# Altium PCB PCB1.PcbDoc
Units mil, origin at the board's own origin, x right, y up, seen from the top; angles counter-clockwise.
Board outline 4000 x 4000 mil, 4 copper layers (Top Layer, Internal Plane 1, Internal Plane 2, Bottom Layer), stack 18.2 mil thick; 19 components, 14 nets, 55 pads, 17 vias.
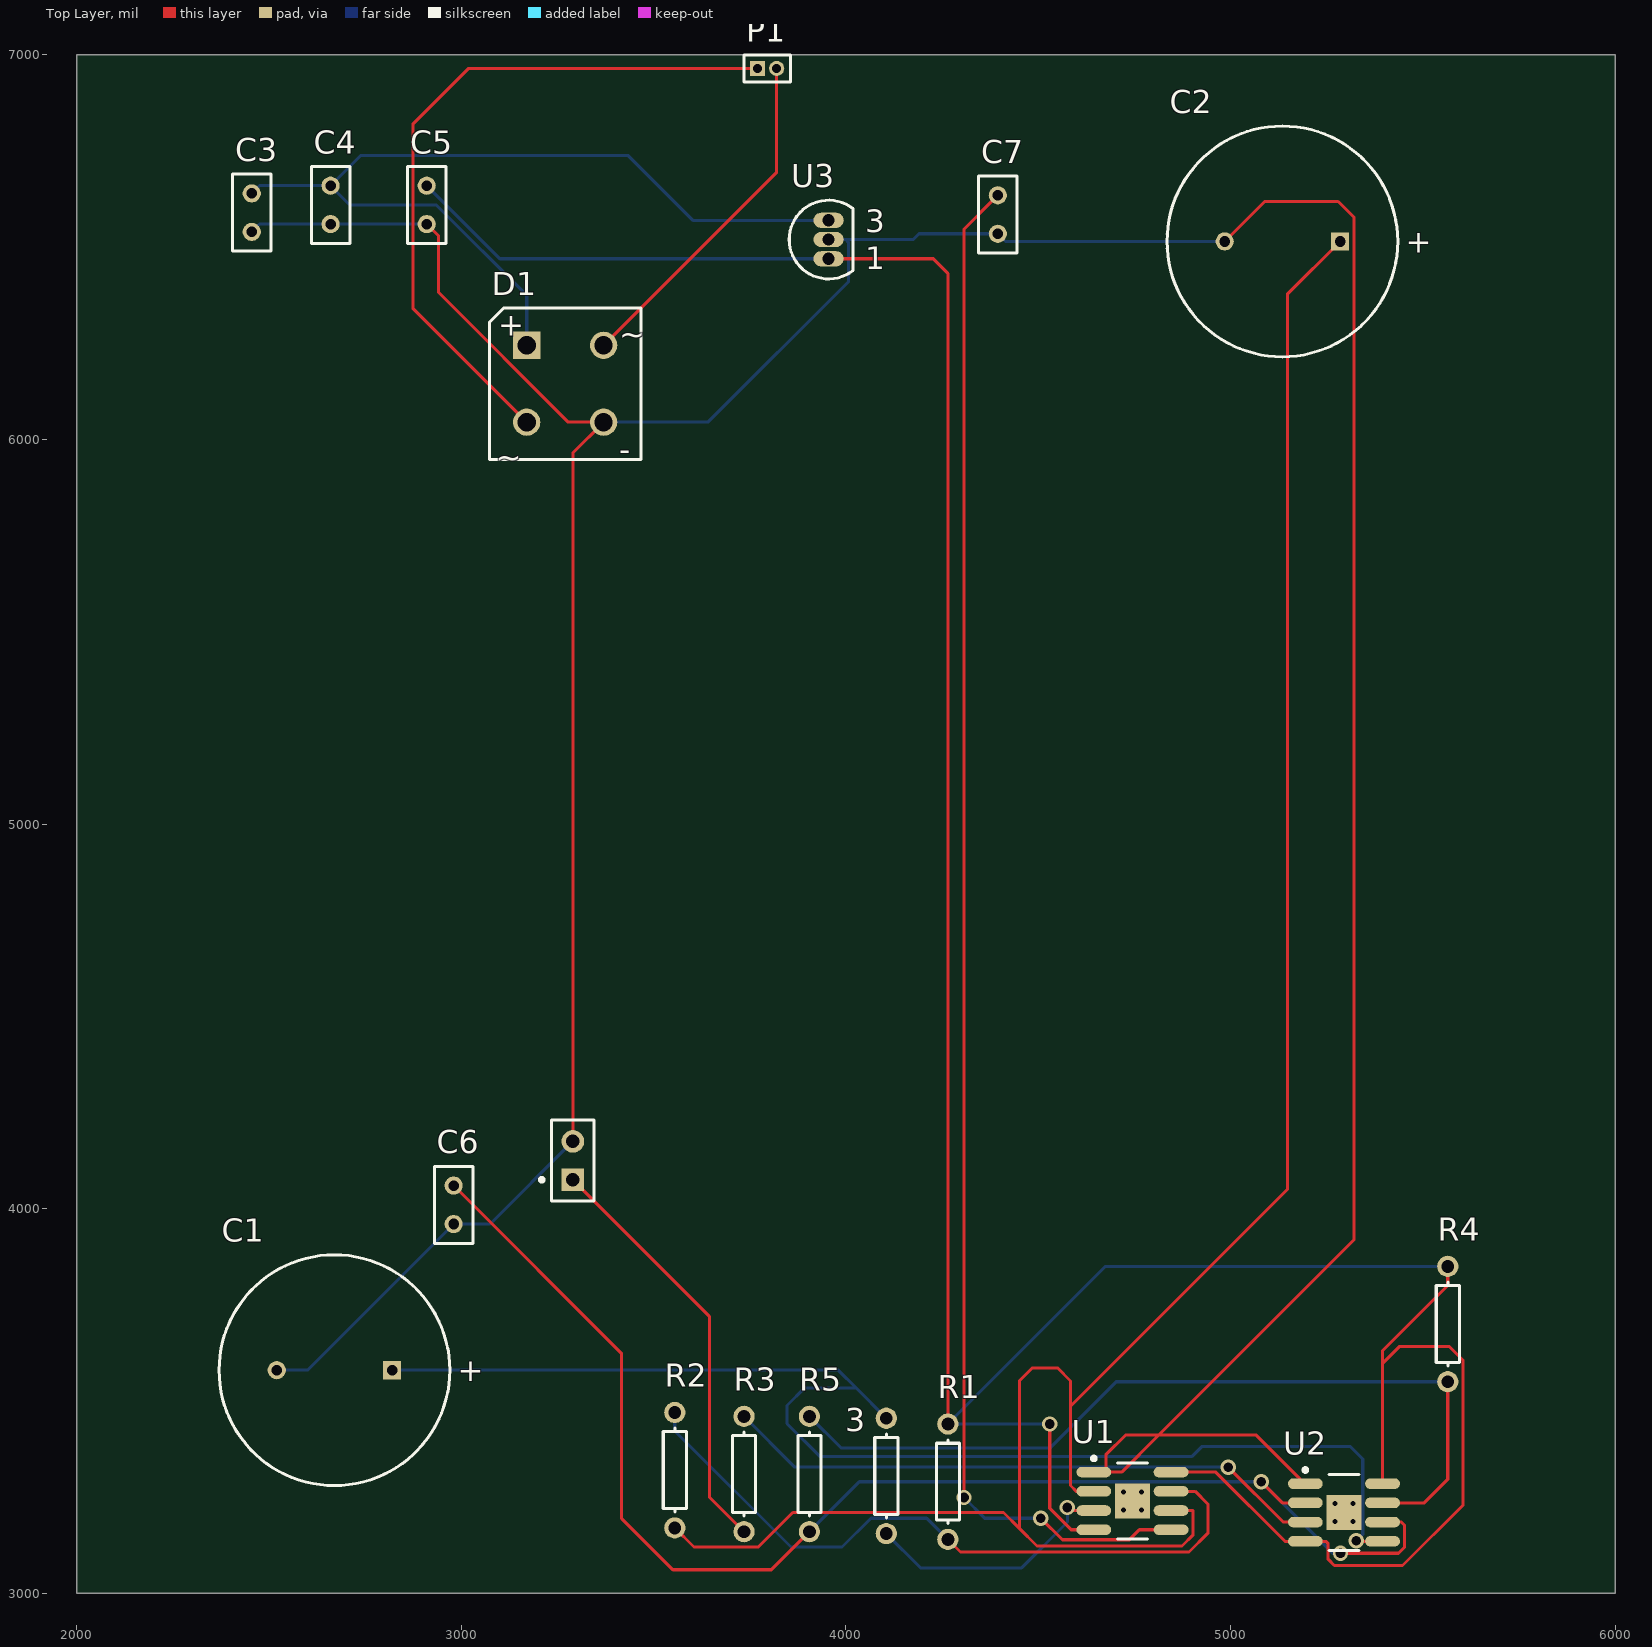
[diagram p0: Top Layer view]
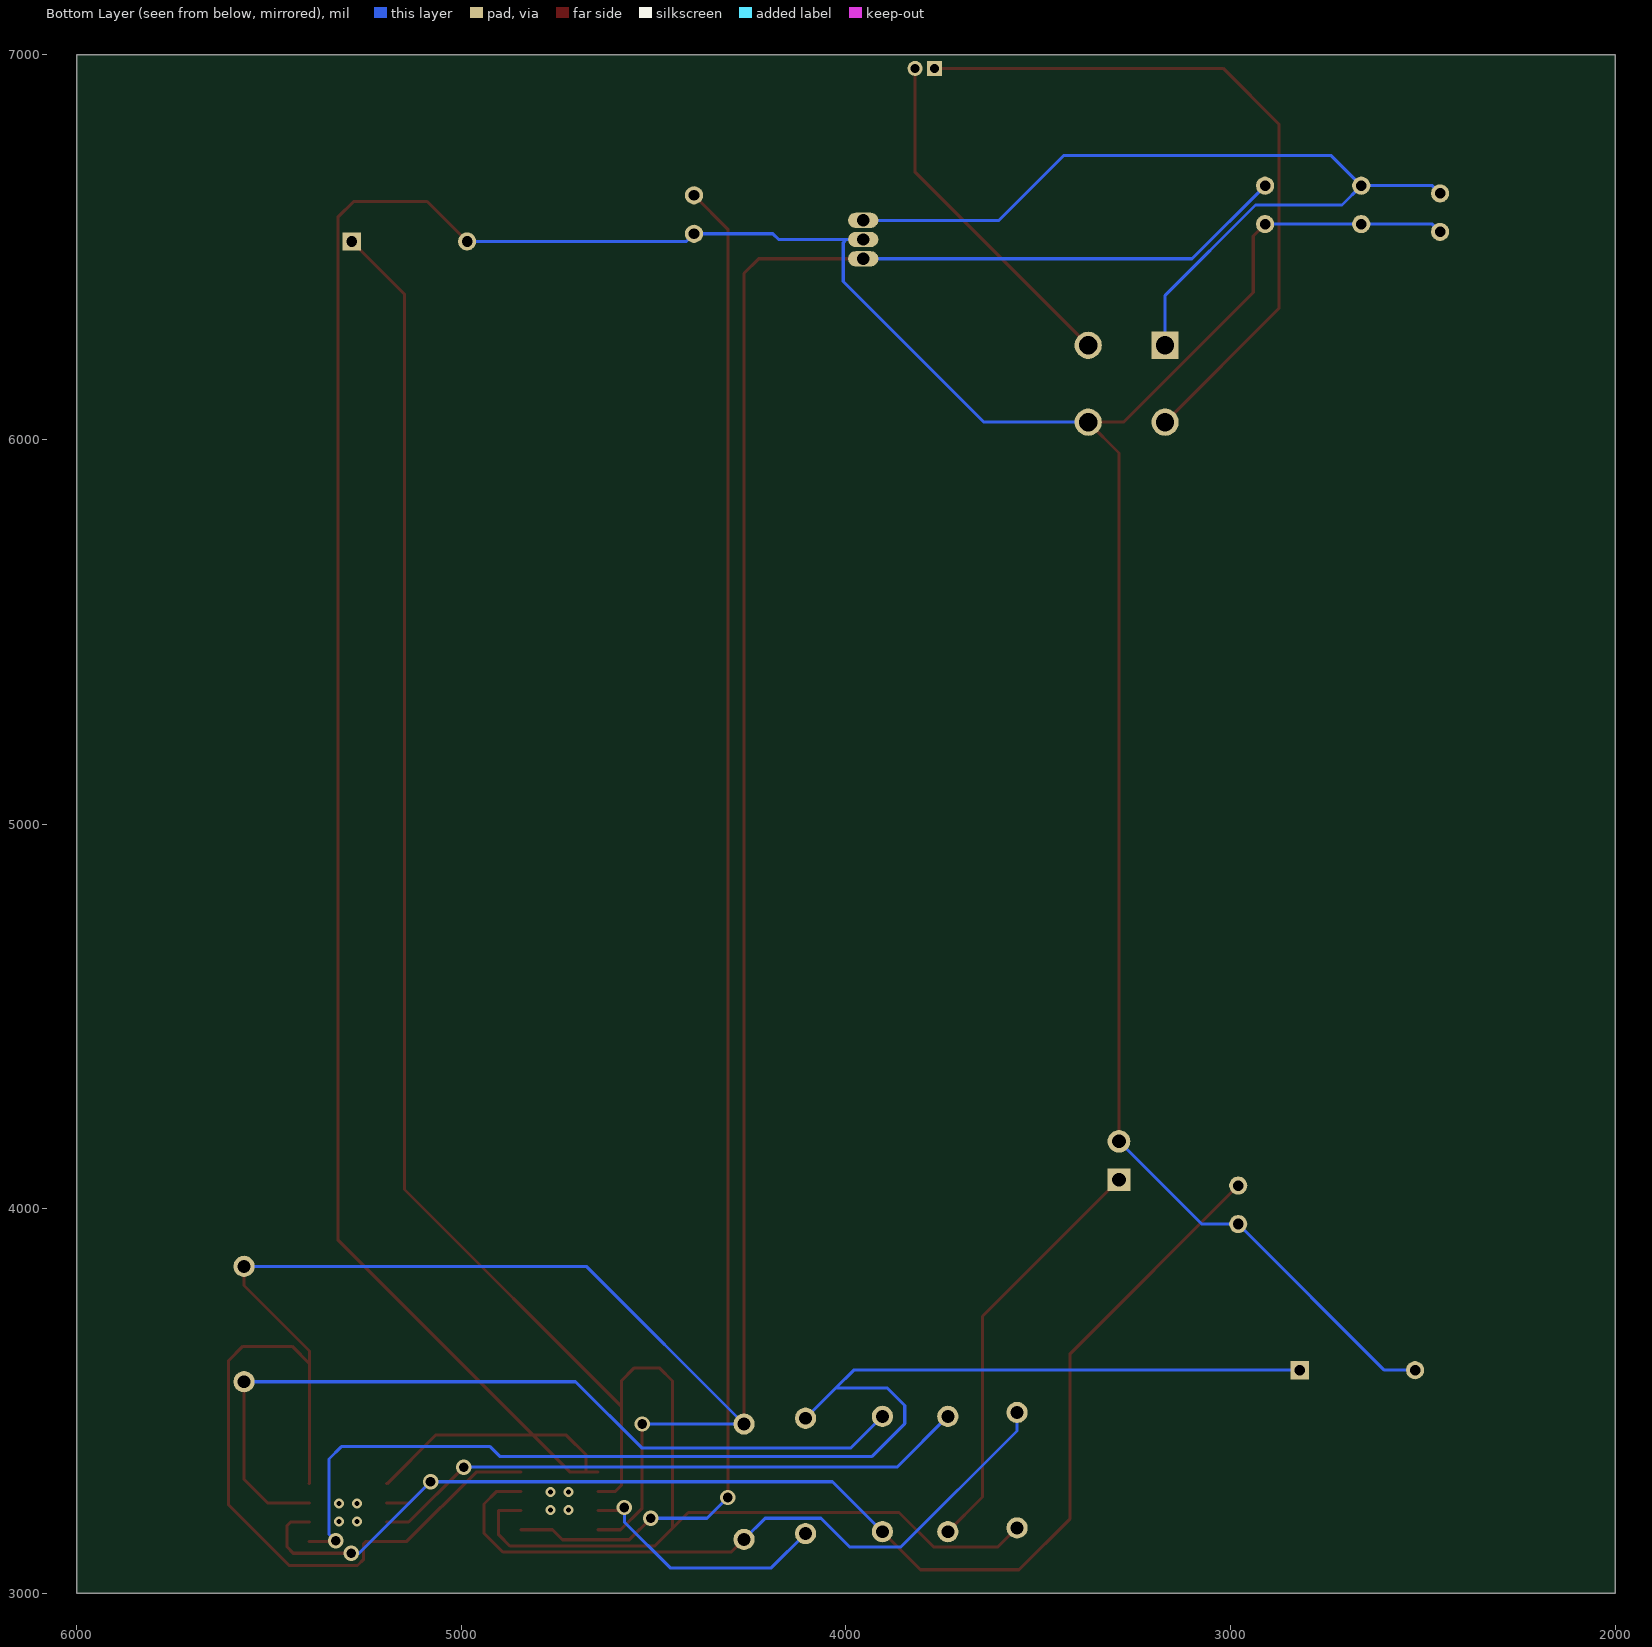
[diagram p1: Bottom Layer view, seen from below]
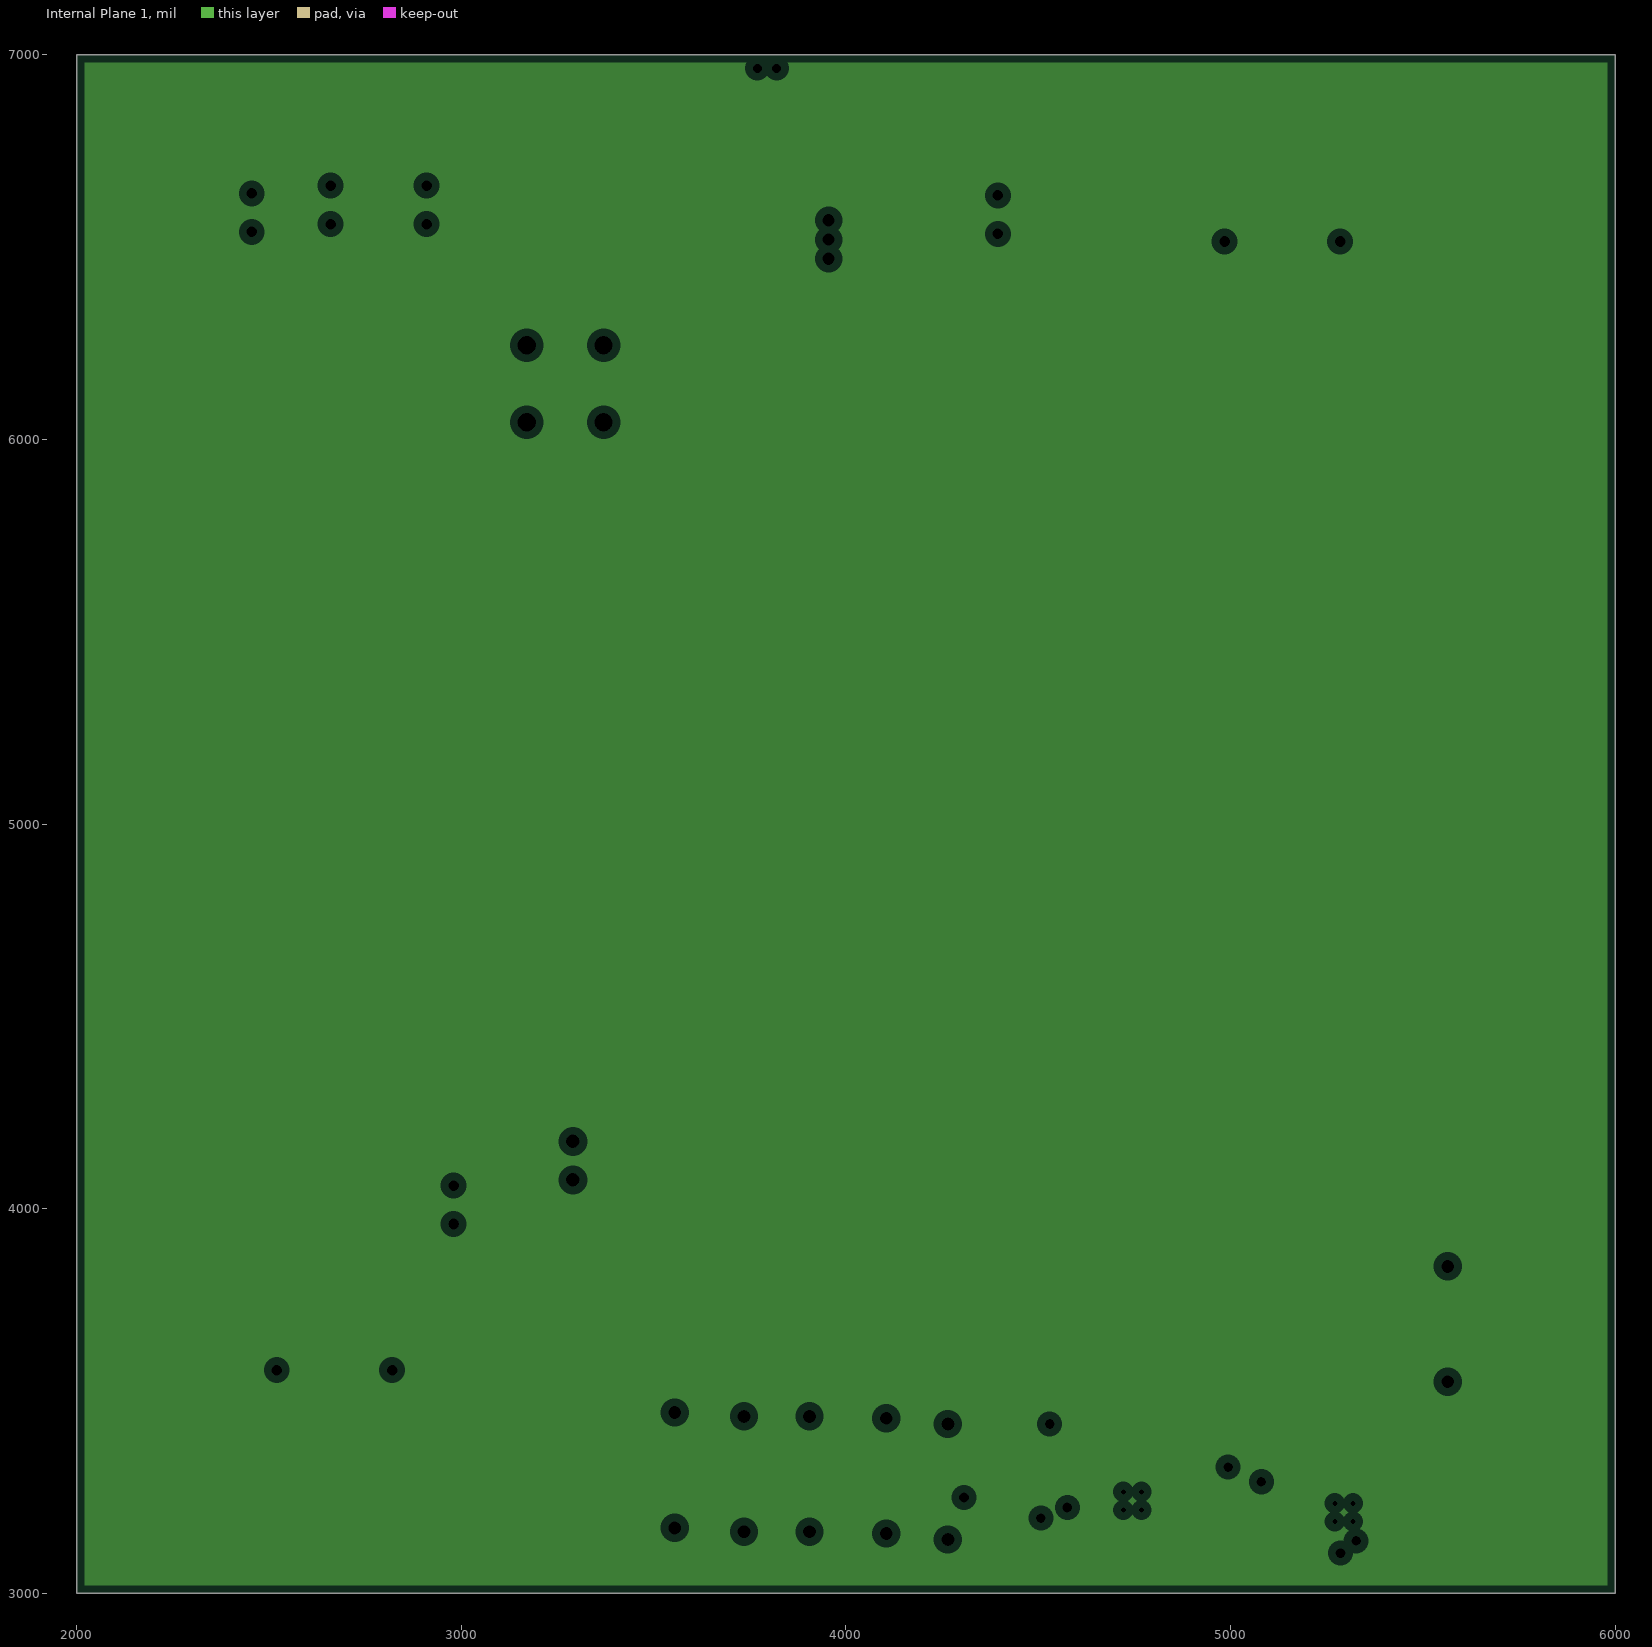
[diagram p2: Internal Plane 1, clearances drawn from the general rule]
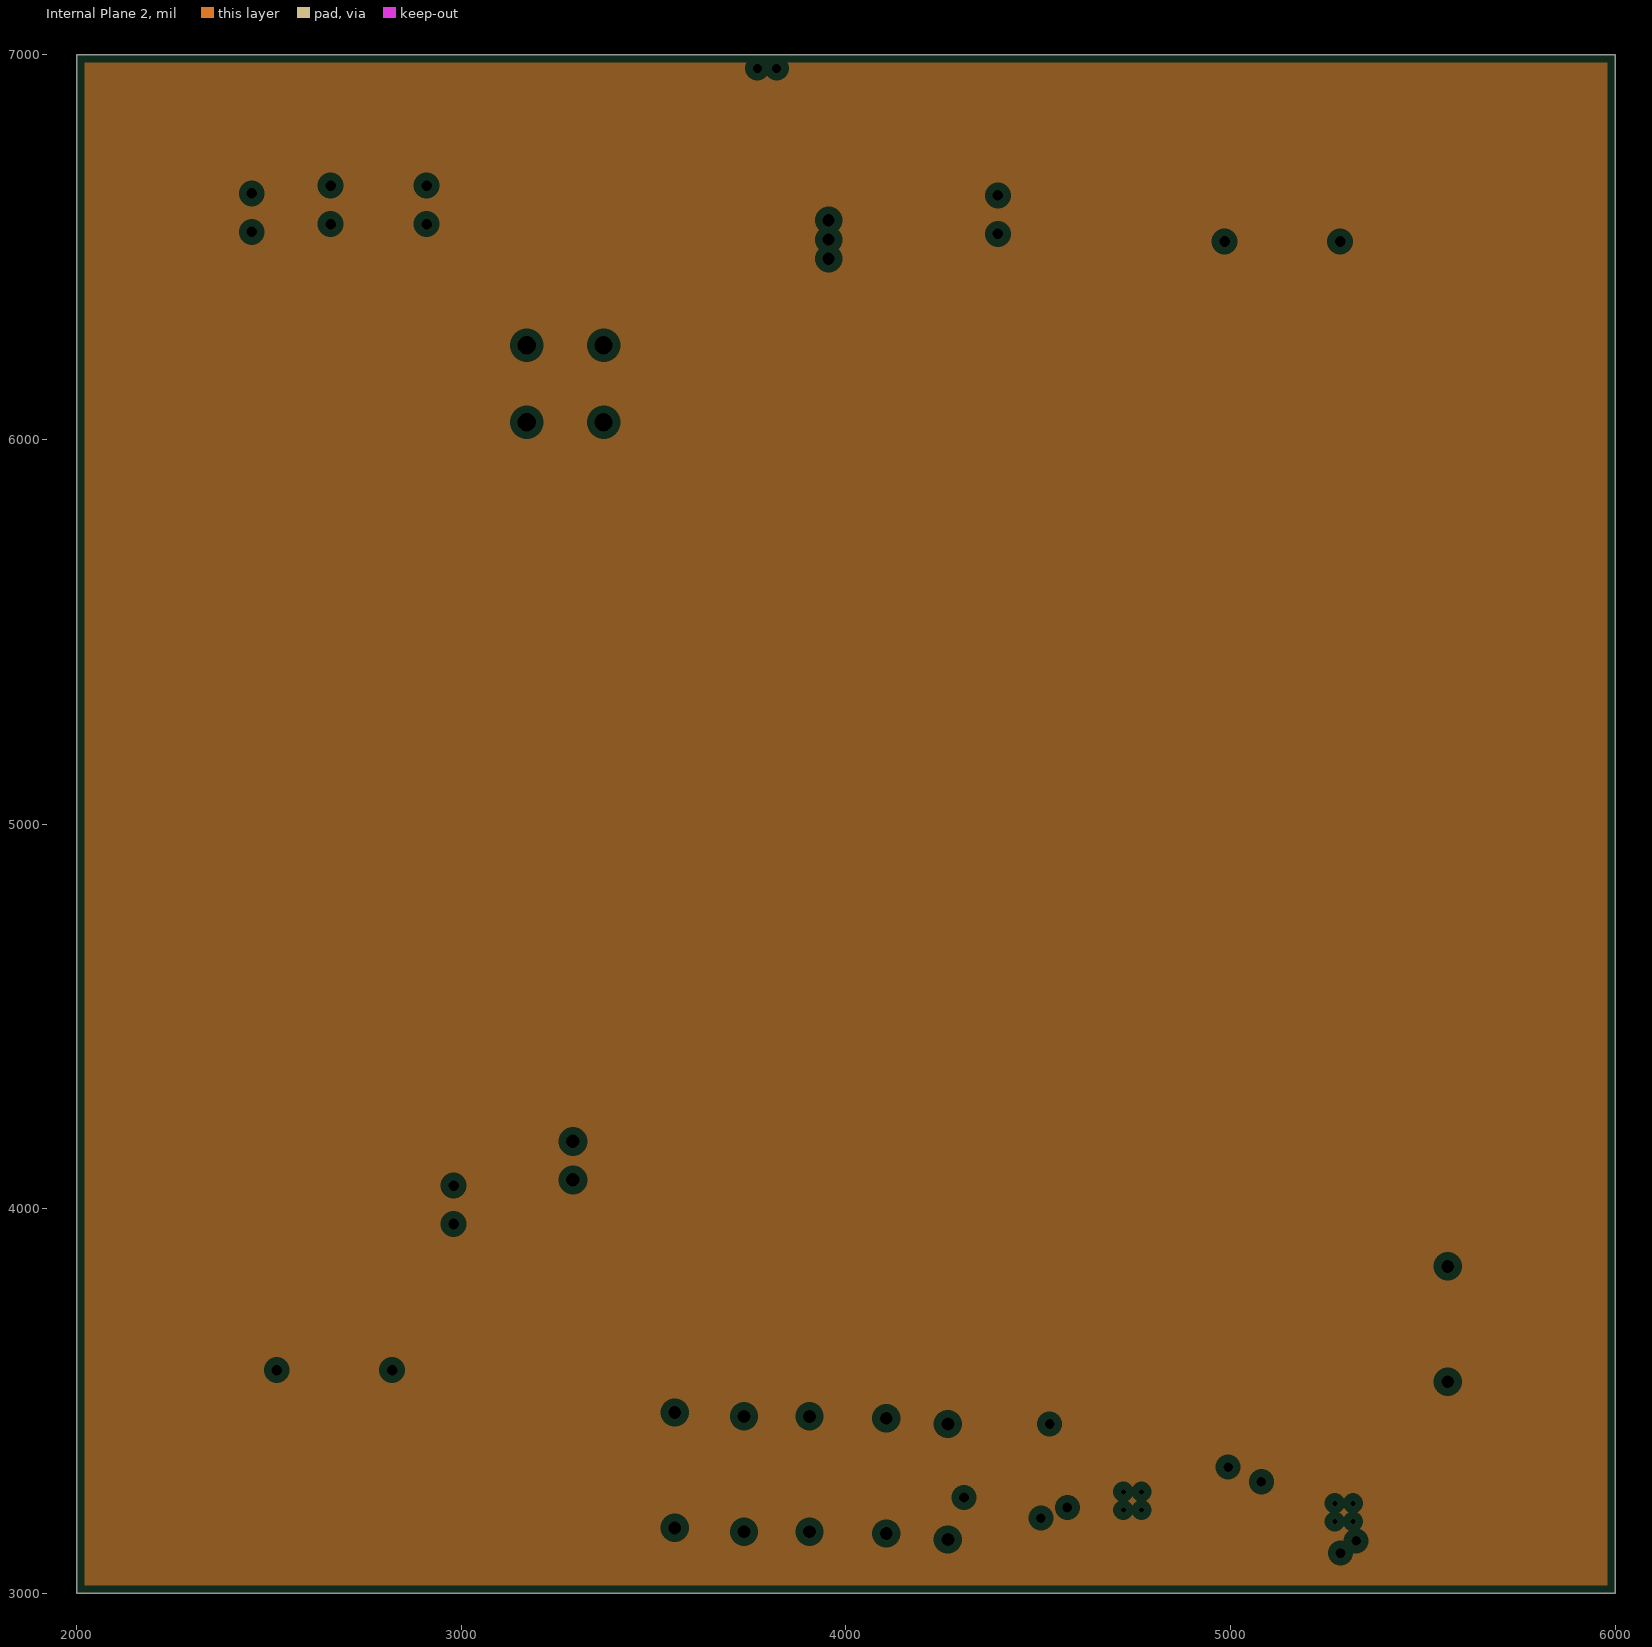
[diagram p3: Internal Plane 2, clearances drawn from the general rule]

## Layer stack, top to bottom
Top Solder: solder mask 0.4, Solder Resist, Dk 3.5
Top Layer: signal copper 1.4
Internal Plane 1: plane copper 1.4
Internal Plane 2: plane copper 1.4
Dielectric 1: dielectric 12.6, FR-4, Dk 4.8
Bottom Layer: signal copper 1.4
Bottom Solder: solder mask 0.4, Solder Resist, Dk 3.5

## Board outline
2000,3000 6000,3000 6000,7000 2000,7000

## Design rules (kind name [scope] priority, off if disabled: settings)
Clearance [All] p1: gap=8 ignorepadtopadclearanceinfootprint=FALSE
PlaneClearance [All] p1: clearance=20
PlaneConnect [All] p1: planeconnectstyle=Relief reliefexpansion=20 reliefentries=4 reliefconductorwidth=10 reliefairgap=10
PolygonConnect [All] p1: connectstyle=Relief reliefconductorwidth=10 reliefentries=4 polygonreliefangle="90 Angle" airgapwidth=10
RoomDefinition Sheet1 [InComponentClass('Sheet1')] p1: confinementstyle=ConfineIn formatcopy=TRUE lockcomponents=FALSE outline 0,0 2000,0 2000,1000 0,1000
RoutingVias [All] p1: holewidth=25 width=40 viastyle="Through Hole" minholewidth=28 minwidth=50 maxholewidth=28 maxwidth=50
SolderMaskExpansion [All] p1: expansion=4
Width [All] p1: maxlimit=8 minlimit=8 preferedwidth=8
28 further rules are at their usual default settings.

## Classes and differential pairs
component class Sheet1: 3 C1 C2 C3 C4 C5 C6 C7 D1 P1 R1 R2 R3 R4 R5

## Components (designator, comment, footprint, x,y, rotation, side; value= is the part's Value field where it differs from the comment)
3 "Res1" AXIAL-0.3 4105,3305 r90 top value=100K
C1 "Cap Pol1" RB7.6-15 2670,3580 r0 top value=100pF
C2 "Cap Pol1" RB7.6-15 5135,6515 r0 top value=100pF
C3 "Cap" RAD-0.1 2455,6590 r90 top value=220uF
C4 "Cap" RAD-0.1 2660,6610 r90 top value=1uF
C5 "Cap" RAD-0.1 2910,6610 r90 top value=1uF
C6 "Cap" RAD-0.1 2980,4010 r90 top value=8.2nF
C7 "Cap" RAD-0.1 4395,6585 r90 top value=10nF
D1 "Bridge1" D-38 3270,6145 r0 top
P1 "MHDR1X2" MHDR1X2 3770,6965 r0 top
R1 "Res1" AXIAL-0.3 4265,3290 r90 top value=10K
R2 "Res1" AXIAL-0.3 3555,3320 r90 top value=47K
R3 "Res1" AXIAL-0.3 3735,3310 r90 top value=470
R4 "Res1" AXIAL-0.3 5565,3700 r90 top value=4.7K
R5 "Res1" AXIAL-0.3 3905,3310 r90 top value=56K
U1 "LM555CM" MRA08A_M 4745,3240 r0 top
U2 "LM555J/883" MRA08A_M 5295,3210 r0 top
U3 "MC78L05ACP" 29-04 3955,6520 r0 top
? "Speaker" PIN2 3290,4075 r90 top

## Footprints (in the part's own frame and the unit in brackets; to place one, negate y for a bottom-side part, rotate by r counter-clockwise, add the part's x,y. Pads: shape width x height; smd on the part's side, far side on the other; paste and mask are expansions set on the pad)
29-04 [mm] "TO, Flat Index; 3 In-Line, Axial Leads; Body Dia. 4.8mm; Leads 0.48 x 0.5 mm (max)"
  oval 2x1 hole 0.8: 1(0,-1.27) 2(0,0) 3(0,1.27)
  silkscreen extent -2.6,-2.6 1.6,2.6
AXIAL-0.3 [mm] "Axial Device, Thru-Hole; 2 Leads; 0.3 in Pin Spacing"
  round 1.4 hole 0.85: 1(-3.81,0) 2(3.81,0)
  silkscreen extent -2.77,-0.76 2.77,0.76
D-38 [mm] "Bridge Rectifier; 4 Terminals; Body 9.4 x 9.4 mm (typ); Pitch 5.08 mm"
  rect 1.8x1.8 hole 1.2: 1(-2.54,2.54)
  round 1.8 hole 1.2: 2(-2.54,-2.54) 3(2.54,-2.54) 4(2.54,2.54)
  silkscreen extent -5,-5 5,5, body extent -5,-5 5,5, height 9.91
MHDR1X2 [mm] "Connector; Header; 2 Position"
  rect 1x1 hole 0.6: 1(0,0)
  round 1 hole 0.6: 2(1.27,0)
  silkscreen extent -0.9,-0.9 2.17,0.9
MRA08A_M [mm] "SOIC, 8-Leads, Body 4.9x3.9mm, Pitch 1.27mm, Exposed Pad, IPC Low Density"
  oval 2.3x0.7 smd: 1(-2.55,1.905) 2(-2.55,0.635) 3(-2.55,-0.635) 4(-2.55,-1.905) 5(2.55,-1.905) 6(2.55,-0.635) 7(2.55,0.635) 8(2.55,1.905)
  rect 2.29x2.29 smd: 9(0,0)
  silkscreen extent -2.67,-2.5 1,2.93, body extent -2,-2.5 2,2.5, height 1.68
PIN2 [mm] "Photosensitive Diode; 2 Leads"
  rect 1.5x1.5 hole 0.9: 1(0,0)
  round 1.5 hole 0.9: 2(2.54,0)
  silkscreen extent -1.4,-1.4 3.94,2.17
RAD-0.1 [mm] "Radial Cap, Thru-Hole; 2 Leads; 0.1 in Pin Spacing"
  round 1.2 hole 0.7: 1(-1.27,0) 2(1.27,0)
  silkscreen extent -2.54,-1.27 2.54,1.27
RB7.6-15 [mm] "Polarized Capacitor (Radial); 2 Leads"
  rect 1.2x1.2 hole 0.7: 1(3.81,0)
  round 1.2 hole 0.7: 2(-3.81,0)
  silkscreen extent -7.62,-7.62 7.62,7.62

## Part data
3 R1 R2 R3 R4 R5: "Resistor", LatestRevisionDate=17-Jul-2002, LatestRevisionNote="Re-released for DXP Platform.", PackageDescription="Axial Device, Thru-Hole; 2 Leads; 0.3 in Pin Spacing", PackageReference=AXIAL-0.3, Published=8-Jun-2000, Publisher="Altium Limited"
C1 C2: "Polarized Capacitor (Radial)", LatestRevisionDate=17-Jul-2002, LatestRevisionNote="Re-released for DXP Platform.", PackageDescription="Polarized Capacitor (Radial); 2 Leads", PackageReference=RB7.6-15, Published=8-Jun-2000, Publisher="Altium Limited"
C3 C4 C5 C6 C7: "Capacitor", LatestRevisionDate=17-Jul-2002, LatestRevisionNote="Re-released for DXP Platform.", PackageDescription="Radial Cap, Thru-Hole; 2 Leads; 0.3 in Pin Spacing", PackageReference=RAD-0.3, Published=8-Jun-2000, Publisher="Altium Limited"
D1: "Full Wave Diode Bridge", DatasheetVersion=E2732B, LatestRevisionDate=29-May-2009, LatestRevisionNote="Sch pins A & K swapped.", PackageDescription="Bridge Rectifier; 4 Terminals; Body 9.4 x 9.4 mm (typ); Pitch 5.08 mm", PackageReference=D-38, Published=8-Jun-2000, Publisher="Altium Limited"
P1: "Header, 2-Pin", LatestRevisionDate=17-Jul-2002, LatestRevisionNote="Re-released for DXP Platform.", Publisher="Altium Limited"
U1: "Timer, 8-pin Narrow SOIC", Manufacturer="National Semiconductor", PackageTopMarking=NSZXTT*LM*555CM, PowerWise=N, Supplier Part Number 1=9488227, Code_IPC=SOIC127P600-8, Code_JEDEC=MS-012-AA, ComponentLink1Description="LM555 Datasheet", ComponentLink1URL=http://www.national.com/ds/LM/LM555.pdf, ComponentLink2Description="LM555 Web Page", ComponentLink2URL=http://www.national.com/pf/LM/LM555.html, ComponentLink3Description="M08A Package Page", ComponentLink3URL=http://www.national.com/packaging/folders/m08a.html, CompType="Analog IC", DatasheetVersion=Jul-2006, PackageDescription="SOIC Narrow, 4.9 x 3.9 x 1.45mm, 8 Lead, 1.27mm Pitch", PackageReference=M08A, PackageVersion="revM, May-2009", PartNumber=LM555CM, PinCount=8, Published=4-Dec-2008, Publisher="Altium Limited", RoHS=N, Supplier 1=Farnell
U2: "Timer, 8-pin CerDIP", Manufacturer="National Semiconductor", PackageTopMarking="NSZSSXXYYA*LM555J/*883 Q", PowerWise=N, ComponentLink1Description="LM555 Datasheet", ComponentLink1URL=http://www.national.com/ds/LM/LM555QML.pdf, ComponentLink2Description="LM555 Web Page", ComponentLink2URL=http://www.national.com/pf/LM/LM555.html, ComponentLink3Description="J08A Package Page", ComponentLink3URL=http://www.national.com/packaging/folders/j08a.html, CompType="Analog IC", DatasheetVersion=Jul-2006, High-Reliability=Y, PackageDescription="Cerdip, .400 x .310in Body, 8 Lead, .300in Centers, .100in Pitch", PackageReference=J08A, PackageVersion="revM, Jul-2002", PartNumber=LM555J/883, PinCount=8, Published=4-Dec-2008, Publisher="Altium Limited", RoHS=N
U3: "3-Terminal Low-Current Positive Fixed Voltage Regulator", ComponentLink1Description="Manufacturer Link", ComponentLink1URL=http://www.onsemi.com/site/products/taxonomy/0,4438,503,00.html, ComponentLink2Description=Datasheet, ComponentLink2URL=http://www.onsemi.com/pub/Collateral/MC78L00A-D.PDF, DatasheetVersion=1988, PackageDescription="TO, Flat Index; 3 In-Line, Axial Leads; Body Dia. 4.8mm; Leads 0.48 x 0.5 mm (max)", PackageReference=29-04, PackageVersion=1996, Published=17-Jul-2002, Publisher="Altium Limited"
?: "Loudspeaker", LatestRevisionDate=17-Jul-2002, LatestRevisionNote="Re-released for DXP Platform.", PackageReference=PIN2, Published=24-Mar-1999, Publisher="Altium Limited"

## Via types
v1: diameter 40, hole 25, Top Layer to Bottom Layer, 9 vias
v2: diameter 25.98, hole 12.99, Top Layer to Bottom Layer, tented top, 8 vias

## Nets (pads, with @x,y where several pads share a name; then routed paths per layer and width w, separated by ;. In a path a pad name is that pad's centre, name@x,y a point inside that pad or via, vN(x,y) a via of type N, cw(c..) or ccw(c..) an arc to the next point about the centre after c; other vN are vias at no path point)
GND: ?.2 C1.2 C2.2 C3.1 C4.1 C5.1 C6.1 C7.1 D1.3 U1.1 U2.1 U3.2 | length 10706.3
  Top Layer w8: C5.1 2940.9,6529.1 2940.9,6382.1 3278,6045 D1.3 3290,5965 ?.2 ; U1.1 U1.1@4676,3315 ; C2.2 5089,6619 5280,6619 5321,6578 5321,3919 4813,3411 ; U2.1 5193,3285 5067,3411 4813,3411 ; U1.1@4676,3315 4676,3360 4727,3411 4813,3411 ; U1.1@4676,3315 4717,3315 4813,3411
  Bottom Layer w8: C3.1 2475,6560 C4.1 C5.1 ; C1.2 2600,3580 C6.1 3075,3960 ?.2 ; D1.3 3641,6045 4007,6411 4007,6512 3999,6520 ; U3.2 3999,6520 ; C2.2 4415,6515 C7.1 4190,6535 4175,6520 3999,6520
Net3_1: 3.1 U1.3 | length 667.1
  Top Layer w8: v1(4576,3223) 4584,3215 U1.3
  Bottom Layer w8: 3.1 4194,3066 4457,3066 4576,3185 v1(4576,3223)
Net3_2: 3.2 C1.1 U2.5 | length 3427.3
  Top Layer w8: v1(5327,3136) 5328,3135 U2.5
  Bottom Layer w8: C1.1 3980,3580 4026,3534 ; 3.2 4026,3534 ; v1(5327,3136) 5344,3153 5344,3349 5312,3381 4925,3381 4899,3355 3933,3355 3847,3441 3847,3488 3893,3534 4026,3534
Net_1: ?.1 R3.1 | length 1099.3
  Top Layer w8: ?.1 3645,3720 3645,3250 R3.1
NetC2_1: C2.1 R2.1 U1.2 U1.6 | length 5777.2
  Top Layer w8: R2.1 3605,3120 3772,3120 3862,3210 4409.79,3210 4451,3168.79 ; U1.2 4599,3265 4584,3280 4584,3486 ; U1.6 4903,3215 4903,3152 4874,3123 4496.79,3123 4451,3168.79 ; C2.1 5148,6378 5148,4050 4584,3486 ; 4451,3168.79 4451,3552 4485,3586 4550,3586 4584,3552 4584,3486
NetC3_2: C3.2 C4.2 D1.1 U3.3 | length 2369.1
  Bottom Layer w8: C3.2 2475,6660 C4.2 ; D1.1 3170,6375 2935,6610 2710,6610 C4.2 ; U3.3 3602,6570 3433,6739 2739,6739 C4.2
NetC6_2: C6.2 R5.1 U2.2 U2.6 | length 3571.4
  Top Layer w8: C6.2 3417,3623 3417,3194 3550,3061 3806,3061 R5.1 ; v1(5080,3290) v1(5080.15,3289.85) 5135,3235 U2.2 ; v1(5286,3104) 5437,3104 5453,3120 5453,3176 5444,3185 U2.6
  Bottom Layer w8: R5.1 4034.85,3289.85 v1(5080.15,3289.85) ; v1(5080,3290) v1(5080.15,3289.85) ; v1(5286,3104) 5266,3104 v1(5080.15,3289.85)
NetC7_2: C7.2 U1.5 | length 4017.2
  Top Layer w8: v1(4307,3249) 4307,6547 C7.2 ; v1(4507,3195) 4563,3139 4737,3139 4763,3165 U1.5
  Bottom Layer w8: v1(4307,3249) 4361,3195 v1(4507,3195)
NetD1_2: D1.2 P1.1 | length 1853.7
  Top Layer w8: D1.2 2874,6341 2874,6820 3019,6965 P1.1
NetD1_4: D1.4 P1.2 | length 906.4
  Top Layer w8: D1.4 3820,6695 P1.2
NetR1_1: R1.1 R2.2 U1.7 | length 1832.2
  Top Layer w8: R1.1 4298,3107 4892,3107 4941,3156 4941,3232 4908,3265 U1.7
  Bottom Layer w8: R2.2 3555,3422 3857,3120 3990,3120 4065,3195 4210,3195 R1.1
NetR3_2: R3.2 U2.3 | length 1573.5
  Top Layer w8: v1(4994,3328) 5137,3185 U2.3
  Bottom Layer w8: R3.2 3867,3328 v1(4994,3328)
NetR4_1: R4.1 R5.2 U2.7 | length 2214.1
  Top Layer w8: U2.7 5504,3235 5565,3296 R4.1
  Bottom Layer w8: R5.2 3987,3378 4531,3378 4703,3550 R4.1
VCC: C5.2 R1.2 R4.2 U1.4 U1.8 U2.4 U2.8 U3.1 | length 8737.8
  Top Layer w8: U3.1 4227,6470 4265,6432 R1.2 ; v1(4530,3440) 4530,3221 4586,3165 U1.4 ; U1.8 4961.58,3315 5141.58,3135 U2.4 5248,3135 5254,3129 5254,3088 5270,3072 5447.45,3072 5605,3229.55 5605,3605 5568,3642 5440,3642 5395,3597 ; U2.8 5395,3285 5395,3597 ; R4.2 5565,3800 5395,3630 5395,3597
  Bottom Layer w8: C5.2 3100,6470 U3.1 ; v1(4530,3440) R1.2 4675,3850 R4.2
pads on no net: U1.9 U2.9
copper on no net:
  other v2: 5271.38,3186.38 5318.62,3186.38 4721.38,3216.38 4768.62,3216.38 5271.38,3233.62 5318.62,3233.62 4721.38,3263.62 4768.62,3263.62

## Text inside footprints (layer, text, board x,y; h text height)
C1: Top Overlay "+" at 2990.15,3550.99 h59.06
C2: Top Overlay "+" at 5455.15,6485.99 h59.06
D1: Top Overlay "~" at 3410,6245 h59.05; Top Overlay "~" at 3090,5925 h59.05; Top Overlay "-" at 3410,5945 h59.05; Top Overlay "+" at 3096.38,6269.57 h59.06
U3: Top Overlay "1" at 4050.32,6442.09 h59.05; Top Overlay "3" at 4050.32,6538.39 h59.05